# EAGLE board Badge_Motor (EAGLE 6.3)
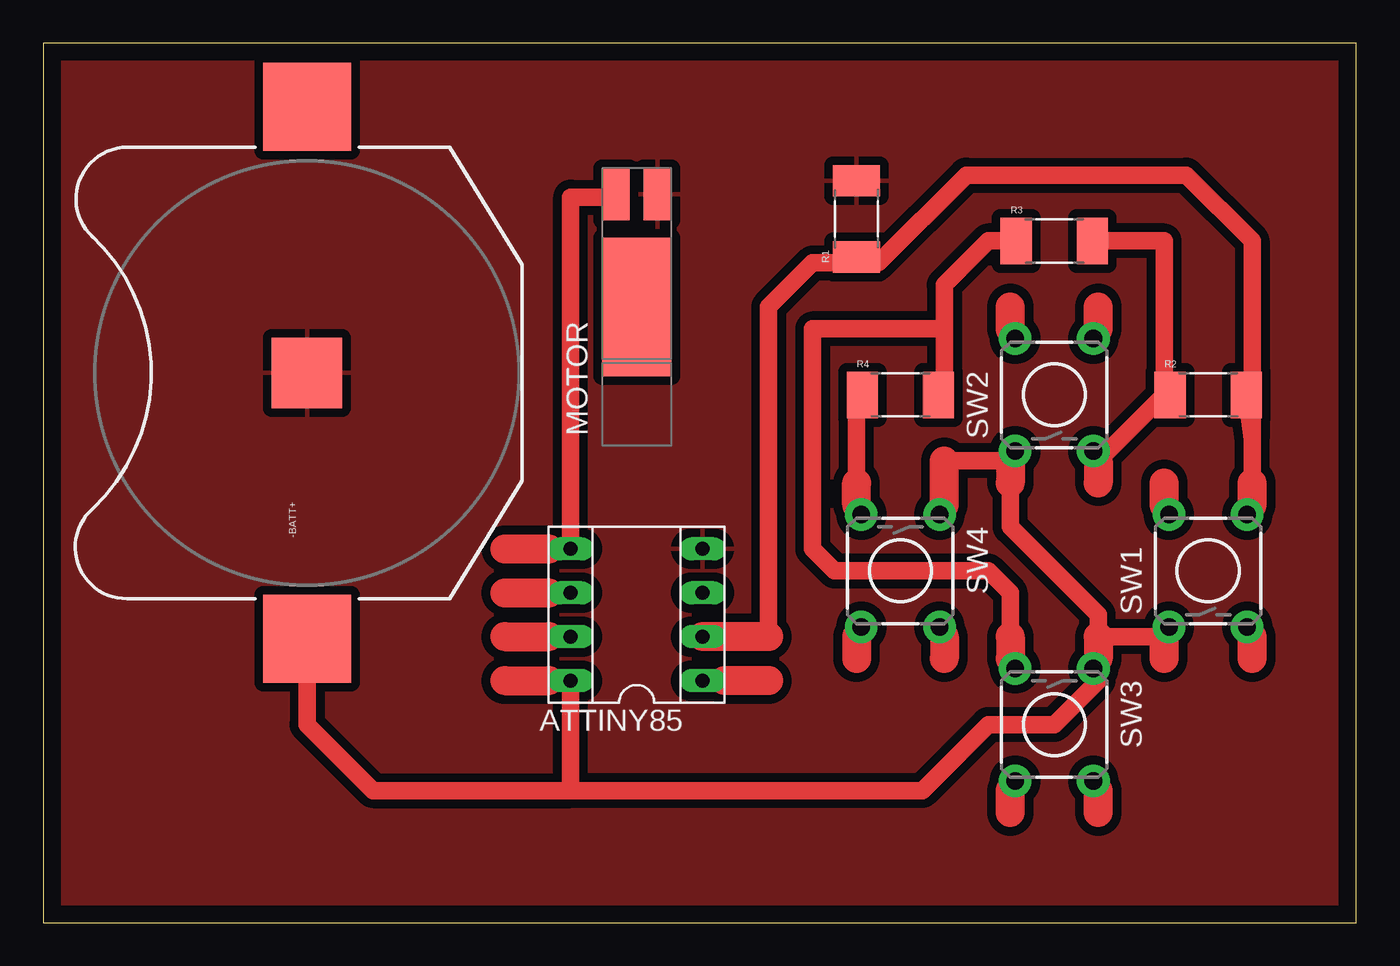
[diagram p0: board, top side]

Size 75.87 x 50.79 mm. Coordinates in mm from the lower left corner, seen from the top.
Outline: 0,0 75.87,0 75.87,50.79 0,50.79 0,0
Copper layers (1*16): Top 0.035mm / dielectric 1.5mm / Bottom 0.035mm
Design rules "Basic_Fall2012 *": minimum track width 40mil, minimum drill 24mil, track to track 20mil, track to pad 20mil, pad to pad 20mil, via to via 20mil, smd to smd 20mil, copper to edge 40mil, drill to drill 8mil, minimum pad ring 10mil, minimum via ring 8mil, stop-mask expansion 4mil, vias tented up to drill 0mil, thermal gap 20mil

## Footprints (pad centres in the part's own frame; a part is rotated, then mirrored left to right if it is on the bottom)
BATTCON_245MM = smd 5.08 x 5.08: 1 -15.367,0; 3 15.367,0 | smd 4.064 x 4.064: 2 0,0
SOCKET-08 = drill 0.813 long: 1 -3.81,-3.81; 2 -1.27,-3.81; 3 1.27,-3.81; 4 3.81,-3.81; 5 3.81,3.81; 6 1.27,3.81; 7 -1.27,3.81; 8 -3.81,3.81
VIB-MOTOR = smd 3 x 1.6: 1 6.5,-1.2; 2 6.5,1.2 | smd 8 x 4: GROUND-PAD 0,0
R2010 = smd 1.8 x 2.7: 1 -2.2,0; 2 2.2,0
TACTILE-PTH = drill 1.016 pad 1.88: 1 -3.251,2.261; 2 3.251,2.261; 3 -3.251,-2.261; 4 3.251,-2.261

## Placement (x,y rotation side)
-BATT+  [BATTCON_245MM]  15.24,31.75 90 top
ATTINY85  [SOCKET-08]  34.29,17.78 90 top
MOTOR  VIB-MOTOR  [VIB-MOTOR]  34.29,35.56 90 top
R1  [R2010]  46.99,40.64 90 top
R2  [R2010]  67.31,30.48 0 top
R3  [R2010]  58.42,39.37 0 top
R4  [R2010]  49.53,30.48 0 top
SW1  [TACTILE-PTH]  67.31,20.32 90 top
SW2  [TACTILE-PTH]  58.42,30.48 90 top
SW3  [TACTILE-PTH]  58.42,11.43 270 top
SW4  [TACTILE-PTH]  49.53,20.32 270 top

## Library data of the parts
-BATT+ R1-R4 SW1-SW4 = SparkFun
ATTINY85 = ic-package
MOTOR = JeffThompson

## Nets
+3V: -BATT+.1 ATTINY85.8 SW1.1 SW2.1 SW3.1 SW4.1
GND: -BATT+.2 ATTINY85.4 MOTOR.1 R1.2
N$1: ATTINY85.5 MOTOR.2
N$4: ATTINY85.2 R1.1 R2.2 SW1.4
N$17: R4.1 SW4.3
N$18: R3.1 R4.2 SW3.3
N$19: R2.1 R3.2 SW2.3

## Tracks (layer width: path | path; a pad name or v marks a point on that pad's centre or on a via)
+3V
  Top 1.016: 30.48,7.62 19.05,7.62 15.24,11.43 -BATT+.1 | 52.07,26.67 55.88,26.67 SW2.1 | 52.07,24.13 SW4.1 | 60.96,15.24 SW3.1 60.96,13.97 58.42,11.43 54.61,11.43 50.8,7.62 30.48,7.62 | SW1.1 64.77,16.51 60.96,16.51 60.96,17.78 55.88,22.86 55.88,25.4 | 30.48,7.62 ATTINY85.8
  Top 1.676: 52.07,24.13 52.07,26.67 | 55.88,26.67 55.88,25.4 | 64.77,15.24 64.77,16.51 | 60.96,16.51 60.96,15.24
GND
  pour Top: 77.47,52.07 77.47,-1.27 -1.27,-1.27 -1.27,52.07
N$1
  Top 1.016: ATTINY85.5 30.48,41.91 33.09,41.91 MOTOR.2
N$4
  Top 1.016: 69.85,25.4 69.85,27.94 | 69.85,24.13 SW1.4 | 41.91,16.51 41.91,35.56 44.45,38.1 46.99,38.1 | 46.99,38.1 R1.1 | 69.85,27.94 69.85,39.37 66.04,43.18 53.34,43.18 48.26,38.1 46.99,38.1 | 69.85,27.94 R2.2
  Top 1.676: 41.91,16.51 ATTINY85.2 | 69.85,24.13 69.85,25.4
N$6
  Top 1.676: 60.96,26.67 60.96,25.4
N$7
  Top 1.676: 64.77,24.13 64.77,25.4
N$8
  Top 1.676: 69.85,15.24 69.85,16.51
N$9
  Top 1.676: 60.96,6.35 60.96,7.62
N$10
  Top 1.676: 55.88,6.35 55.88,7.62
N$11
  Top 1.676: 55.88,34.29 55.88,35.56
N$12
  Top 1.676: 60.96,34.29 60.96,35.56
N$13
  Top 1.676: 46.99,16.51 46.99,15.24
N$14
  Top 1.676: 52.07,16.51 52.07,15.24
N$15
  Top 1.676: 26.67,21.59 29.21,21.59
N$16
  Top 1.676: 26.67,19.05 29.21,19.05
N$17
  Top 1.016: 46.99,25.4 46.99,30.48 R4.1 | 46.99,24.13 SW4.3
  Top 1.676: 46.99,24.13 46.99,25.4
N$18
  Top 1.016: 52.07,34.29 52.07,30.48 R4.2 | R3.1 54.61,39.37 52.07,36.83 52.07,34.29 | 55.88,16.51 55.88,19.05 54.61,20.32 45.72,20.32 44.45,21.59 44.45,34.29 52.07,34.29 | 55.88,15.24 SW3.3
  Top 1.676: 55.88,16.51 55.88,15.24
N$19
  Top 1.016: 64.77,30.48 60.96,26.67 SW2.3 | 64.77,30.48 64.77,39.37 R3.2 | 64.77,30.48 R2.1
N$20
  Top 1.676: 26.67,16.51 29.21,16.51
N$21
  Top 1.676: 26.67,13.97 29.21,13.97
N$22
  Top 1.676: 41.91,13.97 39.37,13.97